# EAGLE board picII (EAGLE 9.6.2)
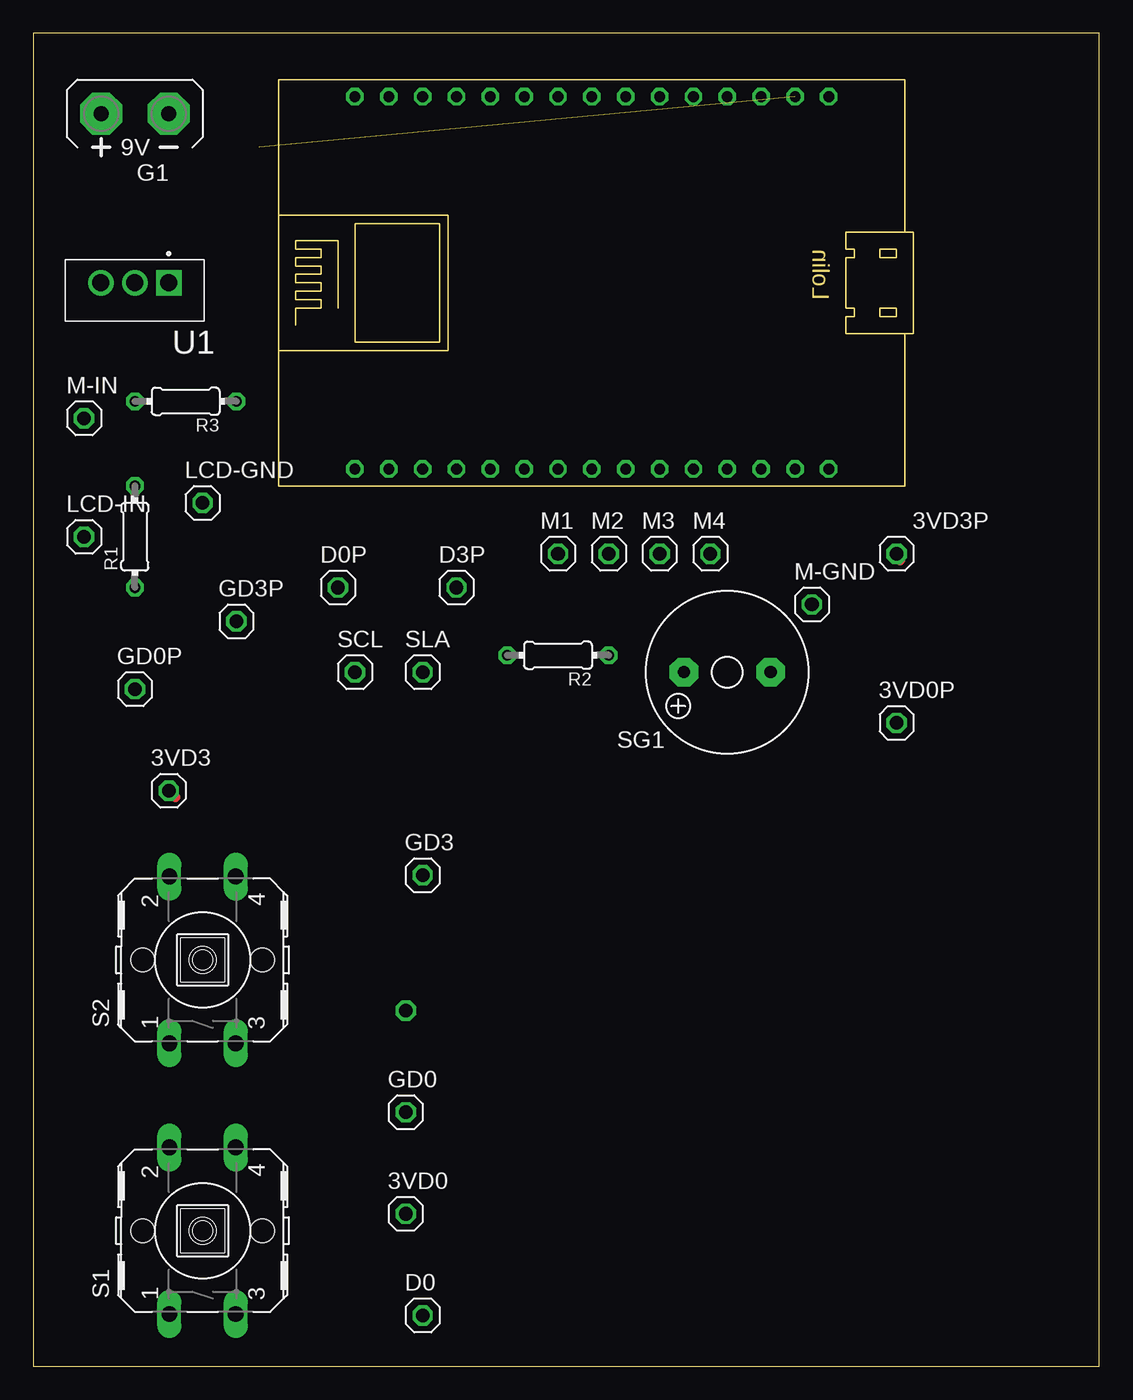
[diagram p0: board, top side]
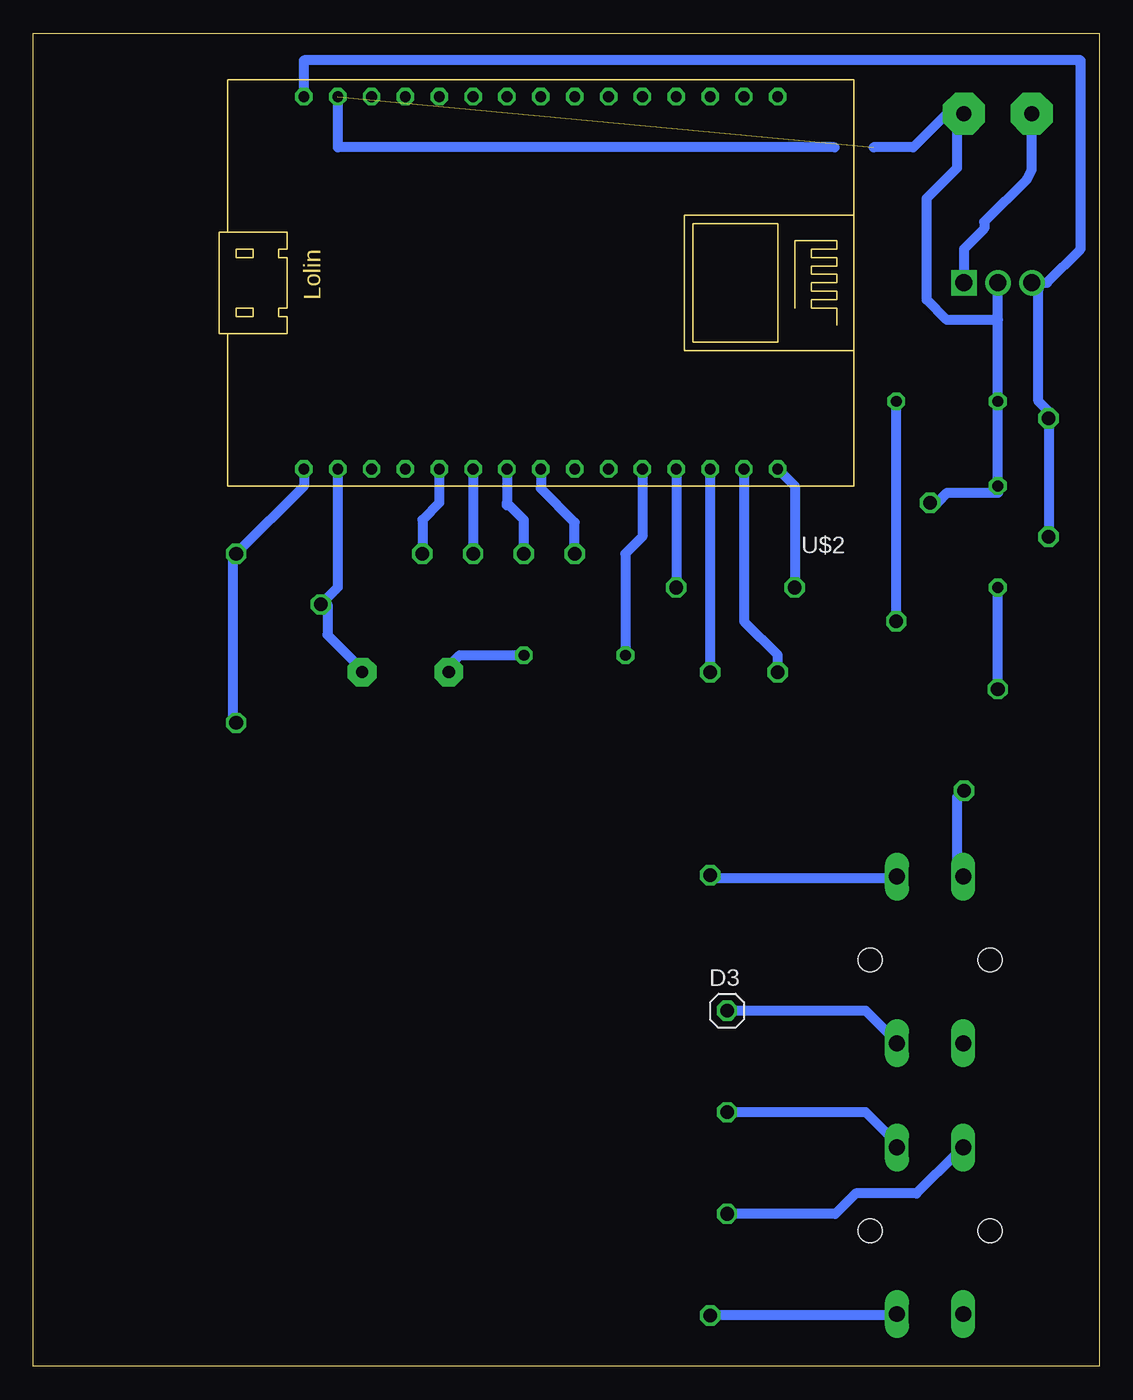
[diagram p1: board, bottom side, seen from below]

Size 79.99 x 100 mm. Coordinates in mm from the lower left corner, seen from the top.
Outline: 0,0 79.99,0 79.99,100 0,100 0,0
Copper layers (1*16): Top 0.035mm / dielectric 1.5mm / Bottom 0.035mm
Design rules "default *": minimum track width 30mil, minimum drill 0.35mm, track to track 30mil, track to pad 30mil, pad to pad 30mil, via to via 30mil, smd to smd 6mil, copper to edge 40mil, drill to drill 6mil, minimum pad ring 10mil, minimum via ring 8mil, stop-mask expansion 4mil, vias tented up to drill 0mil, thermal gap 10mil

## Footprints (pad centres in the part's own frame; a part is rotated, then mirrored left to right if it is on the bottom)
1X01 = drill 1.016 octagon: 1 0,0
AB9V = drill 1.118 pad 3.15 octagon: + 0,2.54; - 0,-2.54
0204/7 = drill 0.813 octagon: 1 -3.81,0; 2 3.81,0
B3F-40XX = drill 1.194 long: 1 -6.248,2.489; 2 6.248,2.489; 3 -6.248,-2.489; 4 6.248,-2.489 | hole 1.803: 0,-4.496; 0,4.496
F/QMX = drill 0.914 pad 2.159 octagon: + 3.251,0; - -3.251,0
TO255P1040X460X1968-3 = drill 1.27 pad 1.91 square: 1 0,0 | drill 1.27 pad 1.91: 2 2.55,0; 3 5.1,0
LOLIN = drill 0.8 octagon: 3V -6.35,13.97; 3V1 16.51,13.97; 3V2 6.35,-13.97; A0 -19.05,-13.97; D0 -19.05,13.97; D1 -16.51,13.97; D2 -13.97,13.97; D3 -11.43,13.97; D4 -8.89,13.97; D5 -1.27,13.97; D6 1.27,13.97; D7 3.81,13.97; D8 6.35,13.97; EN 8.89,-13.97; G -3.81,13.97; G1 13.97,13.97; G2 13.97,-13.97; G3 3.81,-13.97; G4 -16.51,-13.97; RST 11.43,-13.97; RX 8.89,13.97; S0 -1.27,-13.97; S1 -6.35,-13.97; S2 -8.89,-13.97; S3 -11.43,-13.97; SC -3.81,-13.97; SK 1.27,-13.97; TX 11.43,13.97; VIN 16.51,-13.97; VV -13.97,-13.97

## Placement (x,y rotation side)
3VD0  [1X01]  27.94,11.43 0 top
3VD0P  [1X01]  64.77,48.26 0 top
3VD3  [1X01]  10.16,43.18 0 top
3VD3P  [1X01]  64.77,60.96 0 top
D0  [1X01]  29.21,3.81 0 top
D0P  [1X01]  22.86,58.42 0 top
D3  [1X01]  27.94,26.67 0 bottom
D3P  [1X01]  31.75,58.42 0 top
G1  AB9V  [AB9V]  7.62,93.98 90 top
GD0  [1X01]  27.94,19.05 0 top
GD0P  [1X01]  7.62,50.8 0 top
GD3  [1X01]  29.21,36.83 0 top
GD3P  [1X01]  15.24,55.88 0 top
LCD-GND  [1X01]  12.7,64.77 0 top
LCD-IN  [1X01]  3.81,62.23 0 top
M1  [1X01]  39.37,60.96 0 top
M2  [1X01]  43.18,60.96 0 top
M3  [1X01]  46.99,60.96 0 top
M4  [1X01]  50.8,60.96 0 top
M-GND  [1X01]  58.42,57.15 0 top
M-IN  [1X01]  3.81,71.12 0 top
R1  [0204/7]  7.62,62.23 90 top
R2  [0204/7]  39.37,53.34 180 top
R3  [0204/7]  11.43,72.39 180 top
S1  [B3F-40XX]  12.7,10.16 90 top
S2  [B3F-40XX]  12.7,30.48 90 top
SCL  [1X01]  24.13,52.07 0 top
SG1  F/QMX  [F/QMX]  52.07,52.07 180 top
SLA  [1X01]  29.21,52.07 0 top
U1  L7805CV  [TO255P1040X460X1968-3]  10.16,81.28 180 top
U$2  [LOLIN]  43.18,81.28 180 bottom

## Library data of the parts
3VD0 3VD0P 3VD3 3VD3P D0 D0P D3 D3P GD0 GD0P GD3 GD3P LCD-GND LCD-IN M1-M4 M-GND M-IN SCL SLA = pinhead
G1 = battery
R1-R3 = rcl; SPICEPREFIX: R
S1 S2 = switch-omron; MF: OMRON COMPONENTS USA; MPN: B3F-4000; OC_FARNELL: 176434; OC_NEWARK: 36K3105
SG1 = buzzer; OC_FARNELL: unknown; OC_NEWARK: unknown
U1 = L7805CV; AVAILABILITY: In Stock; DESCRIPTION: Linear Voltage Regulator IC Positive Fixed 1 Output 1.5A TO-220; MF: STMicroelectronics; MP: L7805CV; PACKAGE: TO-220-3 STMicroelectronics; PRICE: None; PURCHASE-URL: https://pricing.snapeda.com/search?q=L7805CV&ref=eda
U$2 = Lolin

## Nets
N$1: G1.+ U1.1
N$2: R2.1 SG1.+
N$3: 3VD0P.1 3VD3P.1 U$2.3V1
N$4: M1.1 U$2.D5
N$5: M2.1 U$2.D6
N$6: R2.2 U$2.D4
N$7: GD0.1 S1.4
N$8: SLA.1 U$2.D2
N$9: SCL.1 U$2.D1
N$10: M3.1 U$2.D7
N$11: M4.1 U$2.D8
N$12: D0.1 S1.3
N$13: D3.1 S2.3
N$14: M-GND.1 SG1.- U$2.G1
N$15: G1.- LCD-GND.1 R1.2 R3.2 U1.2 U$2.G2
N$16: GD3.1 S2.4
N$17: LCD-IN.1 M-IN.1 U1.3 U$2.VIN
N$18: GD0P.1 R1.1
N$19: GD3P.1 R3.1
N$20: 3VD0.1 S1.2
N$21: 3VD3.1 S2.2
N$22: D0P.1 U$2.D0
N$23: D3P.1 U$2.D3

## Tracks (layer width: path | path; a pad name or v marks a point on that pad's centre or on a via)
N$1
  Bottom 0.762: U1.1 10.16,83.82 8.64,85.34 8.64,85.85 5.42,89.07 5.08,89.75 G1.+
N$2
  Bottom 0.762: R2.1 48.01,53.34 48.77,52.58 SG1.+
N$3
  Top 0.762: 65.02,48.51 3VD0P.1 | 65.02,60.45 3VD3P.1
  Bottom 0.762: 3VD0P.1 65.02,48.51 65.02,60.71 3VD3P.1 59.69,66.04 U$2.3V1
N$4
  Bottom 0.762: M1.1 39.37,63.31 41.91,65.85 U$2.D5
N$5
  Bottom 0.762: M2.1 43.18,63.5 44.26,64.58 | 44.26,64.58 44.45,64.58 | U$2.D6 44.45,64.77 44.26,64.58
N$6
  Bottom 0.762: U$2.D4 34.29,62.23 35.56,60.96 R2.2
N$7
  Bottom 0.762: GD0.1 17.53,19.05 15.24,16.76 S1.4
N$8
  Bottom 0.762: U$2.D2 SLA.1
N$9
  Bottom 0.762: SCL.1 24.13,53.34 26.67,55.88 U$2.D1
N$10
  Bottom 0.762: U$2.D7 M3.1
N$11
  Bottom 0.762: U$2.D8 49.53,64.77 50.8,63.5 M4.1
N$12
  Bottom 0.762: D0.1 15.24,3.81 S1.3
N$13
  Bottom 0.762: D3.1 17.53,26.67 15.24,24.38 S2.3
N$14
  Bottom 0.762: SG1.- 55.63,52.58 57.91,54.86 57.91,57.15 M-GND.1 57.15,58.42 U$2.G1
N$15  (1 unrouted)
  Top 0.762: 7.62,65.53 R1.2
  Bottom 0.762: LCD-GND.1 12.19,64.77 11.43,65.53 7.62,65.53 R1.2 R3.2 7.62,78.49 | 7.62,78.49 7.62,80.77 U1.2 | 7.62,78.49 11.43,78.49 12.95,80.01 12.95,87.63 10.67,89.92 10.67,93.73 G1.- 11.43,93.98 13.97,91.44 16.95,91.44 | 19.88,91.44 57.15,91.44 U$2.G2
N$16
  Top 0.762: 28.96,36.58 GD3.1 | 15.24,36.58 S2.4
  Bottom 0.762: GD3.1 28.96,36.58 15.24,36.58 S2.4
N$17
  Bottom 0.762: LCD-IN.1 M-IN.1 3.81,71.63 4.57,72.39 4.57,80.77 U1.3 3.94,81.28 1.4,83.82 1.4,97.98 59.69,97.98 U$2.VIN
N$18
  Bottom 0.762: GD0P.1 R1.1
N$19
  Bottom 0.762: GD3P.1 R3.1
N$20
  Bottom 0.762: 3VD0.1 19.81,11.43 18.29,12.95 13.72,12.95 10.67,16 S1.2
N$21
  Top 0.762: 10.67,42.67 3VD3.1 | 10.67,37.34 S2.2
  Bottom 0.762: 3VD3.1 10.67,42.67 10.67,37.34 S2.2
N$22
  Bottom 0.762: U$2.D0 22.86,66.04 D0P.1
N$23
  Bottom 0.762: U$2.D3 D3P.1